# Altium PCB main.PcbDoc
Units mil, origin at the board's own origin, x right, y up, seen from the top; angles counter-clockwise.
Board outline 5193.03 x 2556.03 mil, 2 copper layers (Top Layer, Bottom Layer); 53 components, 131 nets, 440 pads, 127 vias.
Unrouted connection lines stored in the file: 3.
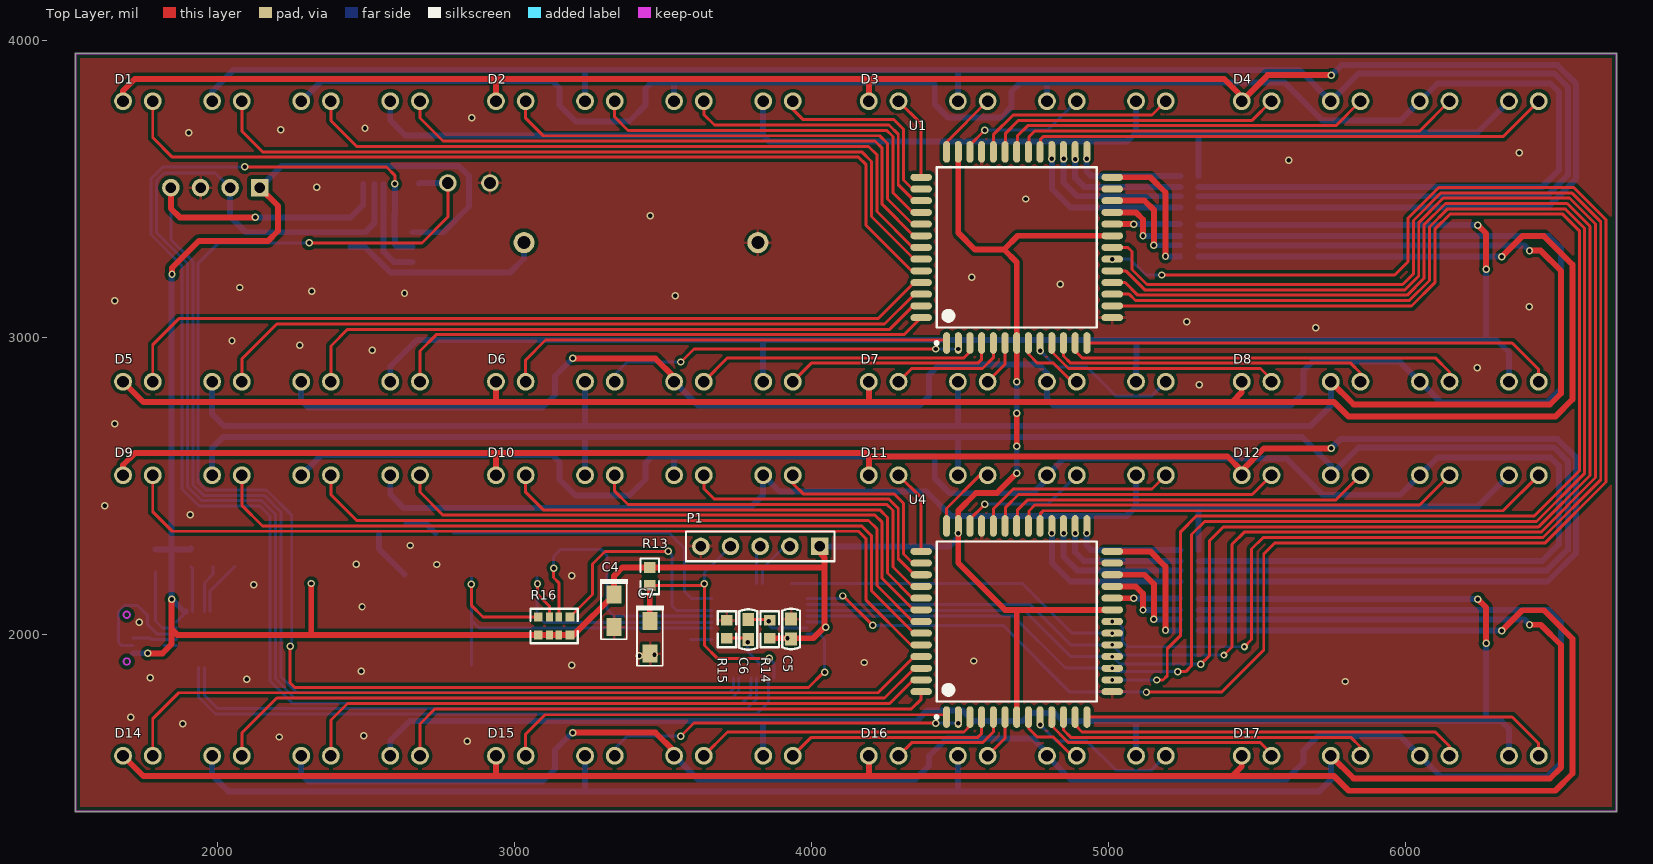
[diagram p0: Top Layer view]
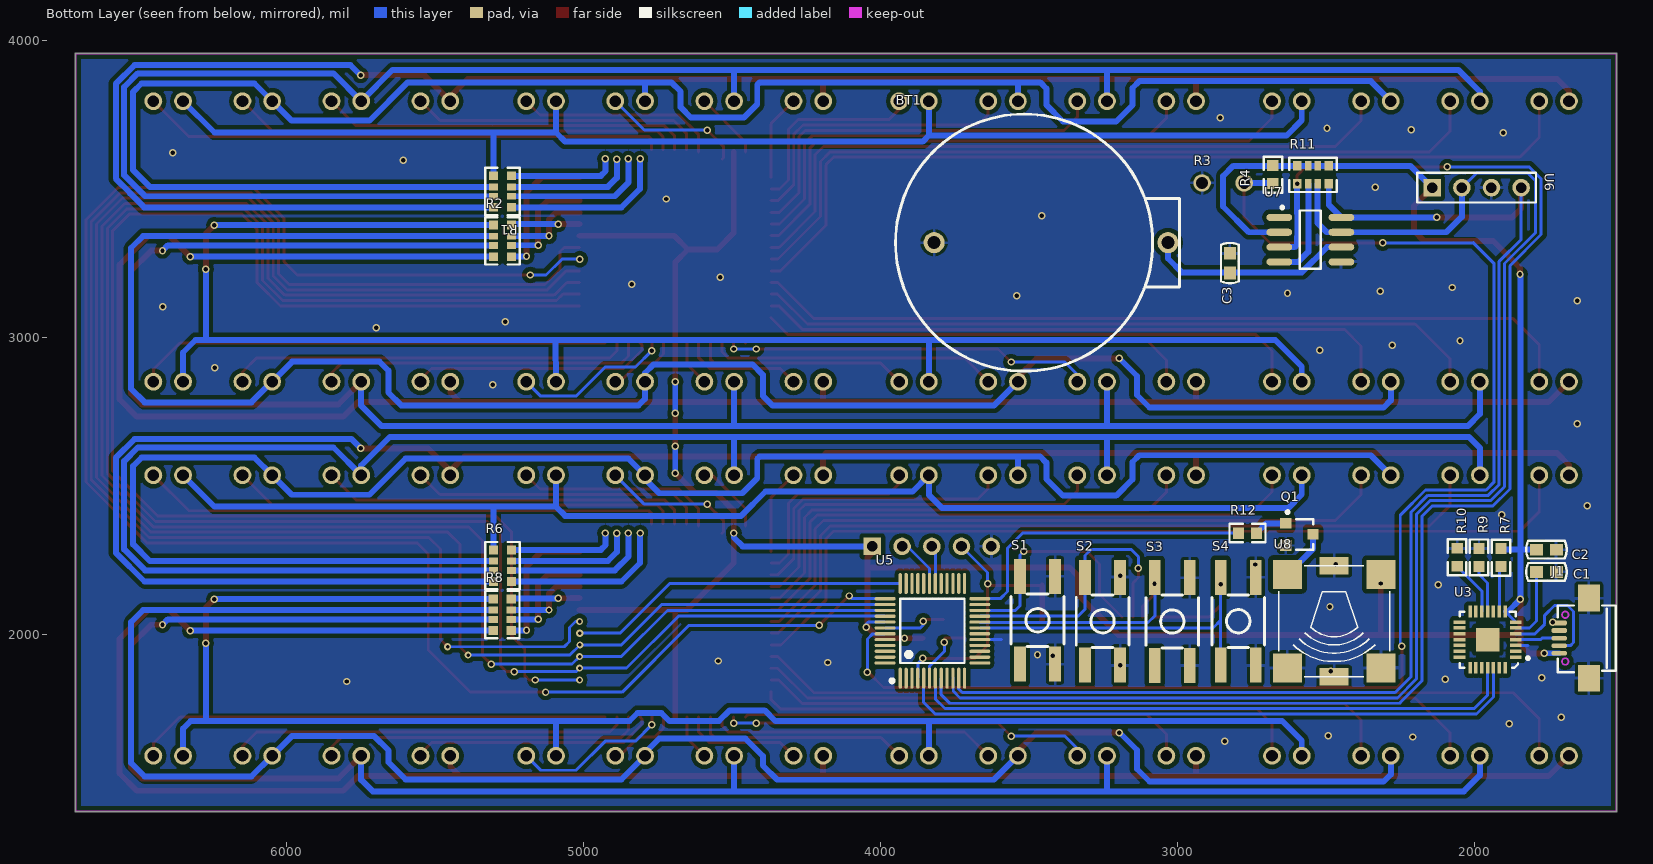
[diagram p1: Bottom Layer view, seen from below]

## Layer stack, top to bottom
Top Solder: solder mask 0.4, Solder Resist, Dk 3.5
Top Layer: signal copper 1.4
Dielectric 1: dielectric 12.6, FR-4, Dk 4.8
Bottom Layer: signal copper 1.4
Bottom Solder: solder mask 0.4, Solder Resist, Dk 3.5

## Board outline
1519.48,1404 ccw(c1522,1404) 1522,1401.48 6710,1401.48 ccw(c6710,1404) 6712.52,1404 6712.52,3955 ccw(c6710,3955) 6710,3957.51 1522,3957.51 ccw(c1522,3955) 1519.48,3955

## Design rules (kind name [scope] priority, off if disabled: settings)
Clearance [All] p1: gap=7 ignorepadtopadclearanceinfootprint=FALSE
HoleSize [All] p1: absolutevalues=TRUE maxlimit=500 minlimit=1 maxpercent=80.000 minpercent=20.000
MinimumSolderMaskSliver [All] p1: minsoldermaskwidth=0
PolygonConnect [All] p1: connectstyle=Relief reliefconductorwidth=10 reliefentries=4 polygonreliefangle="90 Angle" airgapwidth=10
RoutingVias [All] p1: holewidth=15 width=25 viastyle="Through Hole" minholewidth=15 minwidth=25 maxholewidth=28 maxwidth=50
SilkToSilkClearance [All] p1: silktosilkclearance=0
SilkToSolderMaskClearance [IsPad] p1: minsilkscreentomaskgap=0 clearancetoexposedcopper=TRUE
SolderMaskExpansion [All] p1: expansion=4
UnRoutedNet [All] p1: checkbadconnections=TRUE
Width [All] p1: maxlimit=50 minlimit=10 preferedwidth=10
25 further rules are at their usual default settings.

## Components (designator, comment, footprint, x,y, rotation, side; value= is the part's Value field where it differs from the comment)
BT1 "Battery" CR2032-2-1 3516,3319 r180 bottom
C1 "Cap" C-RAD-0603 1757,2210 r0 bottom value=100nF
C2 "Cap" C-RAD-0603 1757,2285 r0 bottom value=100nF
C3 "Cap" C-RAD-0603 2823,3250 r270 bottom value=100nF
C4 "Cap Pol" CAP-3216 3335,2079 r270 top value=100uF
C5 "Cap" C-RAD-0603 3931,2018 r270 top value=100nF
C6 "Cap" C-RAD-0603 3787,2016 r90 top value=100nF
C7 "Cap Pol" CAP-3216 3456,1990 r270 top value=10uF
D1 "LED8*8-TOP" LED8*8-half 2181.1,3795.51 r0 top
D2 "LED8*8-TOP" LED8*8-half 3437.01,3795.51 r0 top
D3 "LED8*8-TOP" LED8*8-half 4692.91,3795.51 r0 top
D4 "LED8*8-TOP" LED8*8-half 5948.82,3795.51 r0 top
D5 "LED8*8-BOTTOM" LED8*8-half 2181.1,2850.63 r0 top
D6 "LED8*8-BOTTOM" LED8*8-half 3437.01,2850.63 r0 top
D7 "LED8*8-BOTTOM" LED8*8-half 4692.91,2850.63 r0 top
D8 "LED8*8-BOTTOM" LED8*8-half 5948.82,2850.63 r0 top
D9 "LED8*8-TOP" LED8*8-half 2181.1,2535.67 r0 top
D10 "LED8*8-TOP" LED8*8-half 3437.01,2535.67 r0 top
D11 "LED8*8-TOP" LED8*8-half 4692.91,2535.67 r0 top
D12 "LED8*8-TOP" LED8*8-half 5948.82,2535.67 r0 top
D14 "LED8*8-BOTTOM" LED8*8-half 2181.1,1590.79 r0 top
D15 "LED8*8-BOTTOM" LED8*8-half 3437.01,1590.79 r0 top
D16 "LED8*8-BOTTOM" LED8*8-half 4692.91,1590.79 r0 top
D17 "LED8*8-BOTTOM" LED8*8-half 5948.82,1590.79 r0 top
J1 "USB_M" USB_MICRO 1614,1987 r90 bottom
P1 "Header5" HDR5X1_A 4027,2296 r180 top
Q1 "SS8050" SOT-23 2588.74,2336.4 r270 bottom
R1 "1K" RES0603ROW 5273,3491 r90 bottom
R2 "1K" RES0603ROW 5273,3325 r90 bottom
R3 "光敏电阻" RES3 2916.73,3520 r180 bottom
R4 "Res1" RES_0603 2678,3548 r90 bottom value=10K
R6 "1K" RES0603ROW 5273,2231 r90 bottom
R7 "Res1" RES_0603 1910,2258 r270 bottom value=10K
R8 "1K" RES0603ROW 5273.31,2065.85 r90 bottom
R9 "Res1" RES_0603 1984,2259 r270 bottom value=10K
R10 "Res1" RES_0603 2058,2259.32 r270 bottom value=10K
R11 "10K" RES0603ROW 2543.25,3547.31 r180 bottom
R12 "Res1" RES_0603 2763.68,2341 r0 bottom value=470
R13 "Res1" RES_0603 3455,2195 r90 top value=10K
R14 "Res1" RES_0603 3859,2017 r90 top value=0K
R15 "Res1" RES_0603 3715,2017 r270 top value=0K
R16 "10K" RES0603ROW 3133,2028 r180 top
S1 "SW-PB4" SW_PB4_A2_4.5*4.5 3471,2047 r90 bottom
S2 "SW-PB4" SW_PB4_A2_4.5*4.5 3252,2044 r90 bottom
S3 "SW-PB4" SW_PB4_A2_4.5*4.5 3017,2043 r90 bottom
S4 "SW-PB4" SW_PB4_A2_4.5*4.5 2795,2044 r90 bottom
U1 "HT1632C" QFP52-14mm-1.0mm 4691,3302.83 r90 top
U3 "CP2102" QFN-28 1860.51,1922.94 r0 bottom
U4 "HT1632C" QFP52-14mm-1.0mm 4691,2043 r90 top
U5 "nuvoton M0516" LQFP-48_7x7x05P 3829.9,2006.55 r90 bottom
U6 "AM2320" HDR4X1_A 2142,3504 r180 bottom
U7 "DS3231M" SOP-8 2552,3329 r180 bottom
U8 "MLT-8530" MLT-8530 2472,2044 r270 bottom

## Footprints (in the part's own frame and the unit in brackets; to place one, negate y for a bottom-side part, rotate by r counter-clockwise, add the part's x,y. Pads: shape width x height; smd on the part's side, far side on the other; paste and mask are expansions set on the pad)
C-RAD-0603 [mm] "贴片电容"
  rect 1.1x1 smd: 1(-0.85,0) 2(0.85,0)
  silkscreen extent -1.73,-0.76 1.73,0.76, body extent -1.14,-0.38 1.14,0.38, height 1
CAP-3216 [mil] "钽电容"
  rect 60x50 smd: 1(-55,0) 2(55,0)
  silkscreen extent -106,-48 96,46
CR2032-2-1 [mm] "纽扣电池CR2032-2-1"
  round 1.8 hole 1.1: 1(12.3,0) 2(-7.7,0)
  silkscreen extent -11,-11 13.3,11
HDR4X1_A [mm] "Connector; Header; 4 Position"
  rect 1.5x1.5 hole 0.9: 1(0,0)
  round 1.5 hole 0.9: 2(2.54,0) 3(5.08,0) 4(7.62,0)
  silkscreen extent -1.27,-1.27 8.89,1.27
HDR5X1_A [mm] "Connector; Header; 5 Position"
  rect 1.5x1.5 hole 0.9: 1(0,0)
  round 1.5 hole 0.9: 2(2.54,0) 3(5.08,0) 4(7.62,0) 5(10.16,0)
  silkscreen extent -1.27,-1.27 11.43,1.27
LED8*8-half [mil]
  round 60 hole 39.37: 1(-400,0) 2(-100,0) 3(200,0) 4(500,0) 5(-500,0) 6(-200,0) 7(100,0) 8(400,0)
LQFP-48_7x7x05P [mm]
  oval 1.8x0.28 smd mask+0.051: 1(-3.923,2.623) 2(-3.923,2.123) 3(-3.923,1.623) 4(-3.923,1.123) 5(-3.923,0.623) 6(-3.923,0.123) 7(-3.923,-0.377) 8(-3.923,-0.877) 9(-3.923,-1.377) 10(-3.923,-1.877) 11(-3.923,-2.377) 12(-3.923,-2.877) 25(4.177,-2.877) 26(4.177,-2.377) 27(4.177,-1.877) 28(4.177,-1.377) 29(4.177,-0.877) 30(4.177,-0.377) 31(4.177,0.123) 32(4.177,0.623) 33(4.177,1.123) 34(4.177,1.623) 35(4.177,2.123) 36(4.177,2.623)
  oval 0.28x1.8 smd mask+0.051: 13(-2.623,-4.177) 14(-2.123,-4.177) 15(-1.623,-4.177) 16(-1.123,-4.177) 17(-0.623,-4.177) 18(-0.123,-4.177) 19(0.377,-4.177) 20(0.877,-4.177) 21(1.377,-4.177) 22(1.877,-4.177) 23(2.377,-4.177) 24(2.877,-4.177) 37(2.877,3.923) 38(2.377,3.923) 39(1.877,3.923) 40(1.377,3.923) 41(0.877,3.923) 42(0.377,3.923) 43(-0.123,3.923) 44(-0.623,3.923) 45(-1.123,3.923) 46(-1.623,3.923) 47(-2.123,3.923) 48(-2.623,3.923)
  silkscreen extent -4.3,-2.88 2.88,3.47
MLT-8530 [mm] "蜂鸣器/MLT-8530"
  rect 2.5x2.5 smd mask+0.051: 1(-4,4) 2(-4,-4) 3(4,-4) 3(4,4)
  rect 1.5x2.5 smd mask+0.051: 3(-4.75,0) 3(4.75,0)
  silkscreen extent -4.75,-4.75 4.75,4.75
QFN-28 [mm]
  rect 1x0.3 smd: 1(0,0) 2(0,-0.5) 3(0,-1) 4(0,-1.5) 5(0,-2) 6(0,-2.5) 7(0,-3) 15(4.8,-3) 16(4.8,-2.5) 17(4.8,-2) 18(4.8,-1.5) 19(4.8,-1) 20(4.8,-0.5) 21(4.8,0)
  rect 0.3x1 smd: 8(0.9,-3.9) 9(1.4,-3.9) 10(1.9,-3.9) 11(2.4,-3.9) 12(2.9,-3.9) 13(3.4,-3.9) 14(3.9,-3.9) 22(3.9,0.9) 23(3.4,0.9) 24(2.9,0.9) 25(2.4,0.9) 26(1.9,0.9) 27(1.4,0.9) 28(0.9,0.9)
  rect 2x2 smd: 29(2.4,-1.5)
  silkscreen extent -1.17,-3.9 4.8,0.9
QFP52-14mm-1.0mm [mm] "QFP, 52-Leads, Body 14.00x14.00mm, Pitch 1.00mm, IPC Medium Density"
  oval 1.85x0.6 smd: 1(-8.175,6) 2(-8.175,5) 3(-8.175,4) 4(-8.175,3) 5(-8.175,2) 6(-8.175,1) 7(-8.175,0) 8(-8.175,-1) 9(-8.175,-2) 10(-8.175,-3) 11(-8.175,-4) 12(-8.175,-5) 13(-8.175,-6) 27(8.175,-6) 28(8.175,-5) 29(8.175,-4) 30(8.175,-3) 31(8.175,-2) 32(8.175,-1) 33(8.175,0) 34(8.175,1) 35(8.175,2) 36(8.175,3) 37(8.175,4) 38(8.175,5) 39(8.175,6)
  oval 0.6x1.85 smd: 14(-6,-8.175) 15(-5,-8.175) 16(-4,-8.175) 17(-3,-8.175) 18(-2,-8.175) 19(-1,-8.175) 20(0,-8.175) 21(1,-8.175) 22(2,-8.175) 23(3,-8.175) 24(4,-8.175) 25(5,-8.175) 26(6,-8.175) 40(6,8.175) 41(5,8.175) 42(4,8.175) 43(3,8.175) 44(2,8.175) 45(1,8.175) 46(0,8.175) 47(-1,8.175) 48(-2,8.175) 49(-3,8.175) 50(-4,8.175) 51(-5,8.175) 52(-6,8.175)
  silkscreen extent -8.3,-6.85 6.85,6.97, body extent -7,-7 7,7, height 3.4
RES3 [mm] "光敏电阻"
  round 1.5 hole 1: 1(0,0) 2(3.6,0)
RES0603ROW [mm]
  rect 0.75x0.8 smd mask+0.051: 1(-1.35,-0.77) 4(1.35,-0.77) 5(1.35,0.77) 8(-1.35,0.77)
  rect 0.58x0.8 smd mask+0.051: 2(-0.4,-0.77) 3(0.4,-0.77) 6(0.4,0.77) 7(-0.4,0.77)
  silkscreen extent -2.03,-1.47 2.02,1.47, body extent -1.6,-0.8 1.6,0.8, height 0.55
RES_0603 [mm]
  rect 0.93x0.98 smd: 1(-0.77,0) 2(0.77,0)
  silkscreen extent -1.53,-0.79 1.54,0.79, body extent -0.85,-0.4 0.85,0.4, height 0.56
SOP-8 [mm] "SOIC-max660"
  oval 2.2x0.6 smd: 1(-2.654,1.905) 2(-2.654,0.635) 3(-2.654,-0.635) 4(-2.654,-1.905) 5(2.654,-1.905) 6(2.654,-0.635) 7(2.654,0.635) 8(2.654,1.905)
  silkscreen extent -2.53,-2.5 0.9,2.88, body extent -1.95,-2.45 1.95,2.45, height 1.75
SOT-23 [mm]
  rect 0.9x0.95 smd: 1(-0.95,-1.175) 2(0.95,-1.175) 3(0,1.175)
  silkscreen extent -2.03,-1.14 1.3,1.18
SW_PB4_A2_4.5*4.5 [mm]
  rect 3x1 smd: 1(-3.75,1.5) 2(-3.75,-1.5) 3(3.75,-1.5) 4(3.75,1.5)
  silkscreen extent -2.25,-2.25 2.25,2.25
USB_MICRO [mm] "USB方孔"
  oct 0.4x1.35 smd: 1(-1.3,2.54) 2(-0.65,2.54) 3(0,2.54) 4(0.65,2.54) 5(1.3,2.54)
  rect 2.286x1.9 smd: 5(-3.429,0) 5(3.429,0)
  Keep-Out Layer circle w0.15: c2,2.023 r0.28
  Keep-Out Layer circle w0.15: c-2,2.023 r0.28
  silkscreen extent -2.92,-2.29 2.79,2.67

## Part data
BT1: "备份电池", LatestRevisionDate=17-Jul-2002, LatestRevisionNote="Re-released for DXP Platform.", PackageReference=BAT-2, Published=24-Mar-1999, Publisher="Altium Limited"
C1 C2 C3 C5 C6: "无极性电容", LatestRevisionDate=17-Jul-2002, LatestRevisionNote="Re-released for DXP Platform.", PackageReference=RAD-0.3, Published=8-Jun-2000, Publisher="Altium Limited"
C4 C7: "极性电解电容", LatestRevisionDate=17-Jul-2002, LatestRevisionNote="Re-released for DXP Platform.", PackageReference=RB7.6-15, Published=8-Jun-2000, Publisher="Altium Limited", Vol=16V
D1 D2 D3 D4 D9 D10 D11 D12: "8*8LED点阵上半部分"
D5 D6 D7 D8 D14 D15 D16 D17: "8*8LED点阵下半部分"
J1: "MicroUSB接口"
P1: "接插件"
Q1: "NPN贴片三极管", PackageDocument=Sep-1998, Code_JEDEC=TO-92A, ComponentLink1Description="Manufacturer Link", ComponentLink1URL=http://www.fairchildsemi.com/, ComponentLink2Description=Datasheet, ComponentLink2URL=http://www.fairchildsemi.com/ds/2N%2F2N3904.pdf, DatasheetDocument=1997, LatestRevisionDate=15-Jan-2003, LatestRevisionNote="PCB Footprint 'BCY-W3/D4.7' replaced", PackageReference=TO-92A, Published=8-Jun-2000, Publisher="Altium Limited"
R1 R2 R6 R8 R11 R16: library part "Res Row", "排阻0603*4"
R3: library part res3
R4 R7 R9 R10 R12 R13 R14 R15: "贴片电阻", LatestRevisionDate=17-Jul-2002, LatestRevisionNote="Re-released for DXP Platform.", PackageReference=AXIAL-0.4, Published=8-Jun-2000, Publisher="Altium Limited"
S1 S2 S3 S4: "微动开关", LatestRevisionDate=17-Jul-2002, LatestRevisionNote="Re-released for DXP Platform.", PackageReference=SPST-2, Published=24-Mar-1999, Publisher="Altium Limited"
U1 U4: "32×8 & 24×16 LED 驱动芯片"
U3: "USBתTTLоƬ"
U5: "新唐M0516单片机"
U6: "温湿度传感器"
U7: "实时时钟"
U8: "贴片蜂鸣器"

## Via types
v1: diameter 25, hole 15, Top Layer to Bottom Layer, 119 vias
v2: diameter 24, hole 12, Top Layer to Bottom Layer, 8 vias

## Nets (pads, with @x,y where several pads share a name; then routed paths per layer and width w, separated by ;. In a path a pad name is that pad's centre, name@x,y a point inside that pad or via, vN(x,y) a via of type N, cw(c..) or ccw(c..) an arc to the next point about the centre after c; other vN are vias at no path point)
AGND: C6.1 R15.2 U5.6 | length 209.4
  Top Layer w10: R15.2 C6.1@3782.85,1986.68
  Bottom Layer w10: v1(3785,1973) 3785,1942 3834.74,1892.26 U5.6
AVCC: C6.2 R14.2 U5.42 | length 222.8
  Top Layer w10: C6.2 3856.85,2049.46 R14.2 v1(3856,2044.32)
  Bottom Layer w10: v1(3856,2044.32) 3856,2031 3865.61,2021.39 U5.42
GND: BT1.2 C1.1 C2.1 C3.1 C4.2 C5.1 C7.2 J1.5 P1.5 Q1.2 R3.1 R9.1 R10.1 R15.1 S1.2 S1.3 S2.2 S2.3 S3.2 S3.3 S4.2 S4.3 U1.14 U1.25 U1.36 U3.3 U4.14 U4.25 U4.36 U5.17 U6.3 U7.5 U8.3 | length 114.6
  Bottom Layer w10: 1819.32,1962.32 U3.3 ; 3592.02,1982.02 U5.17
  other v1: 2841,1640 2207,1654 2492,1658 1882,1699 1707,1721 5797,1841 2098,1849 1773,1853 2483,1876 3192.94,1896.36 4177,1905 4546,1910 3420,1927 3471,1931 1735,2041 2486,2092 2122,2167 3192.94,2196.64 2737,2235 2467,2236.01 2648,2299 1907,2403 1620,2433 1653,2709 5306,2840 6242,2898 2521,2956 2276,2973 2048,2988 5698,3033 5264,3052 6417,3103 1653,3124 3541,3140 2629,3149 2317,3155 2074,3168 4838,3179 4539,3202 3456,3410 4722,3466 2333,3505 5607,3597 6384,3622 1903,3689 2212,3699 2496,3704 2856,3739
ICE-CLK: P1.3 U5.30 | length 129.9
  Bottom Layer w10: U5.30 3815.06,2284.06 P1.3
ICE-DAT: P1.2 U5.31 | length 173.8
  Bottom Layer w10: U5.31 3834.74,2221.74 3909,2296 P1.2
ICE-RST: C7.1 P1.4 R13.1 U5.4 | length 986.5
  Top Layer w10: R13.1 3633.69,2164.69 v1(3639,2170) 3639,1962 3682,1919 v1(3857,1919)
  Top Layer w20: R13.1 3455,2046 C7.1
  Bottom Layer w10: v1(3639,2170) 3639,2208 P1.4 ; v1(3857,1919) 3874.11,1901.89 U5.4
NetBT1_1: BT1.1 C3.2 U7.6 | length 692.1
  Bottom Layer w20: U7.6 2496,3304 2581,3219 2985,3219 3031.75,3265.75 BT1.1
NetC1_2: C1.2 U3.6 | length 245.1
  Bottom Layer w10: C1.2 1790.46,2044.54 1813.63,2021.37 U3.6
NetD1_1: D1.1 U1.48 | length 3016.2
  Top Layer w10: D1.1@1781.1,3795.67 D1.1 1781.1,3672.9 1847,3607 4158,3607 4184,3581 4184,3377 4336.74,3224.26 U1.48@4369.15,3224.26
NetD1_2: D1.2 U1.47 | length 2675.8
  Top Layer w10: D1.2@2081.1,3795.67 D1.2 2081.1,3694.9 2151,3625 4169,3625 4202,3592 4202,3407 4345.37,3263.63 U1.47@4369.15,3263.63
NetD1_3: D1.3 U1.46 | length 2342.5
  Top Layer w10: D1.3@2381.1,3795.67 D1.3 2381.1,3729.9 2468,3643 4192,3643 4220,3615 4220,3424 4341,3303 U1.46@4369.15,3303
NetD1_4: D1.4 U1.45 | length 2019.8
  Top Layer w10: D1.4@2681.1,3795.67 D1.4 2681.1,3738.9 2759,3661 4214,3661 4238,3637 4238,3448 4343.63,3342.37 U1.45@4369.15,3342.37
NetD1_5: D1.5 D2.5 D3.5 D4.5 R1.8 | length 6842.6
  Top Layer w20: D1.5@1681.1,3795.67 1681.1,3830.1 1721,3870 2937.01,3870 ; D2.5@2937.01,3795.67 2937.01,3870 ; D3.5@4192.91,3795.67 4192.91,3857.91 4194,3859 4194,3870 ; v1(5751,3883) 5536.15,3883 5448.82,3795.67 5448.82,3811.18 5390,3870 4194,3870 ; 2937.01,3870 4194,3870
  Bottom Layer w20: R1.8 6479.85,3437.85 6527,3485 6527,3486.4 6575,3534.4 6575,3854.6 6512.6,3917 5785,3917 v1(5751,3883)
NetD1_6: D1.6 D2.6 D3.6 D4.6 R1.7 | length 6510.5
  Bottom Layer w20: D1.6@1981.1,3795.67 1981.1,3828.1 2054,3901 3237,3901 ; D2.6@3237.01,3795.67 3237.01,3858.99 3237,3901 ; D3.6@4492.91,3795.67 4492.91,3900.91 5643.57,3900.91 5748.82,3795.67 5842.15,3889 6501,3889 6547,3843 6547,3546 6476.25,3475.25 R1.7 ; 4493,3901 3237,3901
NetD1_7: D1.7 D2.7 D3.7 D4.7 R1.6 | length 6374
  Bottom Layer w20: D1.7@2281.1,3775.9 D1.7 2281.1,3795.67 2348.43,3863 3128,3863 3151,3840 3151,3782 3206,3727 3385,3727 3441,3783 3441,3838 3462,3859 3537,3859 ; D2.7@3537.01,3795.67 3537.01,3858.99 ; D3.7@4792.91,3795.67 4792.91,3857.91 4794,3859 ; R1.6 6460.75,3506.75 6517,3563 6517,3827 6489,3855 6108.15,3855 5983.15,3730 5721,3730 5592,3859 4794,3859 ; 3537,3859 4407,3859 4415,3851 4415,3785 4460,3740 4638,3740 4673,3775 4673,3828 4704,3859 4794,3859
NetD1_8: D1.8 D2.8 D3.8 D4.8 R1.5 | length 4284.9
  Bottom Layer w20: D1.8@2581.1,3795.67 D1.8 2581.1,3730.9 2631.99,3680.01 3837.01,3680.01 ; D2.8@3837.01,3795.67 D2.8 3837.01,3680.01 ; 5092.91,3691.09 D3.8 D3.8@5092.91,3795.67 ; R1.5 5303.32,3689.91 ; D4.8@6348.82,3795.67 6243.06,3689.91 5303.32,3689.91 ; 3837.01,3680.01 3858.02,3659 5062,3659 5092.91,3689.91 5303.32,3689.91
NetD2_1: D2.1 U1.44 | length 1646.9
  Top Layer w10: D2.1@3037.01,3795.67 D2.1 3037.01,3737.99 3096,3679 4230,3679 4256,3653 4256,3466 4340.26,3381.74 U1.44@4369.15,3381.74
NetD2_2: D2.2 U1.43 | length 1329.8
  Top Layer w10: D2.2@3337.01,3795.67 D2.2 3337.01,3741.99 3382,3697 4253.54,3697 4274,3676.54 4274,3487 4339.89,3421.11 U1.43@4369.15,3421.11
NetD2_3: D2.3 U1.42 | length 996.7
  Top Layer w10: D2.3@3637.01,3795.67 D2.3 3637.01,3750.99 3673,3715 4261,3715 4292,3684 4292,3514 4345.52,3460.48 U1.42@4369.15,3460.48
NetD2_4: D2.4 U1.41 | length 671.1
  Top Layer w10: D2.4@3937.01,3795.67 D2.4 3937.01,3767.99 3972,3733 4278,3733 4310,3701 4310,3530 4340.15,3499.85 U1.41@4369.15,3499.85
NetD3_1: D3.1 U1.40 | length 288
  Top Layer w10: D3.1 4369.15,3719.28 U1.40
NetD3_2: D3.2 U1.39 | length 228
  Top Layer w10: U1.39@4454.78,3624.85 4454.78,3657.54 D3.2@4592.91,3795.67
NetD3_3: D3.3 U1.37 | length 473.1
  Top Layer w10: U1.37@4534,3600 4528,3606 4528,3642 v1(4584,3698)
  Bottom Layer w10: v1(4584,3698) 4795.24,3698 D3.3@4892.91,3795.67
NetD3_4: D3.4 U1.35 | length 685
  Top Layer w10: U1.35@4612.26,3624.85 4612.26,3682.26 4679,3749 5146.24,3749 D3.4@5192.91,3795.67
NetD4_1: D4.1 U1.34 | length 995.7
  Top Layer w10: U1.34@4653.63,3631.85 4653.63,3687.63 4697,3731 5484.15,3731 D4.1@5548.82,3795.67
NetD4_2: D4.2 U1.33 | length 1250.7
  Top Layer w10: U1.33@4693,3631.85 4693,3678 4728,3713 5766.15,3713 D4.2@5848.82,3795.67
NetD4_3: D4.3 U1.32 | length 1509.8
  Top Layer w10: U1.32@4732.37,3631.85 4732.37,3675.37 4752,3695 6048.15,3695 D4.3@6148.82,3795.67
NetD4_4: D4.4 U1.31 | length 1766
  Top Layer w10: U1.31@4771.74,3631.85 4771.74,3667.74 4780,3676 6329.15,3676 D4.4@6448.82,3795.67
NetD5_1: D5.1 U1.49 | length 2799.3
  Top Layer w10: D5.1@1781.1,2850.79 1781.1,2975.1 1869,3063 4224,3063 4345.89,3184.89 U1.49@4369.15,3184.89
NetD5_2: D5.2 U1.50 | length 2454.8
  Top Layer w10: D5.2@2081.1,2850.79 2081.1,2927.1 2199,3045 4246,3045 4346.52,3145.52 U1.50@4369.15,3145.52
NetD5_3: D5.3 U1.51 | length 2164.3
  Top Layer w10: D5.3@2381.1,2850.79 2381.1,2971.1 2437,3027 4263,3027 4342.15,3106.15 U1.51@4369.15,3106.15
NetD5_4: D5.4 U1.52 | length 1838.1
  Top Layer w10: D5.4 2681.1,2954.1 2736,3009 4311.54,3009 U1.52
NetD5_5: D5.5 D6.5 D7.5 D8.5 R2.8 | length 6957.9
  Top Layer w20: D5.5@1681.1,2850.79 1749.89,2782 2936,2782 ; D6.5@2937.01,2850.79 D6.5 2937.01,2783.01 2936,2782 ; D7.5@4192.91,2850.79 D7.5 4192.91,2783.91 4191,2782 ; D8.5@5448.82,2850.79 D8.5 5448.82,2814.82 5416,2782 ; v1(6325,3272) 6394,3341 6467,3341 6563,3245 6563,2791 6505,2733 5809,2733 5760,2782 5416,2782 ; 2936,2782 4191,2782 ; 4191,2782 5416,2782
  Bottom Layer w20: R2.8@5303.63,3272.7 5304.33,3272 v1(6325,3272)
NetD5_6: D5.6 D6.6 D7.6 D8.6 R2.7 | length 6794.8
  Top Layer w20: D8.6@5748.82,2850.79 5825.61,2774 6487,2774 6524,2811 6524,3224 6456,3292 v1(6418,3292)
  Bottom Layer w20: D5.6@1981.1,2850.79 D5.6 1981.1,2741.9 2022,2701 3235,2701 ; D6.6@3237.01,2850.79 D6.6 3237.01,2703.01 3235,2701 ; D7.6@4492.91,2850.79 D7.6 4492.91,2701 ; R2.7@5303.63,3310.1 6399.9,3310.1 v1(6418,3292) ; D8.6@5748.82,2850.79 D8.6 5748.82,2769.82 5680,2701 4492.91,2701 ; 3235,2701 4492.91,2701
NetD5_7: D5.7 D6.7 D7.7 D8.7 R2.6 | length 6594.8
  Top Layer w20: v1(3195,2929) 3474,2929 3537.01,2865.99 D6.7@3537.01,2850.79
  Bottom Layer w20: D5.7@2281.1,2850.79 D5.7 2281.1,2787.9 2305,2764 3094,2764 3136,2806 3136,2870 v1(3195,2929) ; D6.7@3537.01,2850.79 3617.8,2770 4363,2770 4396,2803 4396,2874 4431,2909 4764,2909 4792.91,2880.09 D7.7 4792.91,2793.09 4815,2771 5614,2771 5657,2814 5657,2888 5687,2918 5981.61,2918 6118.61,2781 6478,2781 6524,2827 6524,3301 6483.4,3341.6 R2.6@5303.63,3341.6
NetD5_8: D5.8 D6.8 D7.8 D8.8 R2.5 | length 5586.7
  Top Layer w20: v1(6244,3378) 6272,3350 v1(6272,3230)
  Bottom Layer w20: D5.8@2581.1,2850.79 2581.1,2902.1 2670.35,2991.35 6273,2991.35 ; D6.8@3837.01,2850.79 3837.01,2989 ; D7.8@5092.91,2850.79 5093.98,2988.01 ; R2.5@5303.63,3379 6243,3379 v1(6244,3378) ; v1(6272,3230) 6272,2992.35 6273,2991.35 ; D8.8@6348.82,2850.79 6348.82,2949.18 6306.65,2991.35 6273,2991.35
NetD6_1: D6.1 U1.1 | length 1522.8
  Top Layer w10: D6.1@3037.01,2850.79 3037.01,2924.01 3104,2991 4444.93,2991 U1.1@4454.78,2981.15
NetD6_2: D6.2 U1.2 | length 1237.2
  Top Layer w10: v1(3560,2917) 3603.85,2960.85 v1(4418.85,2960.85) ; v1(4494.15,2960.85) U1.2 U1.2@4494.15,2981.15
  Bottom Layer w10: D6.2@3337.01,2850.79 3337.01,2875.01 3379,2917 v1(3560,2917) ; v1(4418.85,2960.85) v1(4494.15,2960.85)
NetD6_3: D6.3 U1.3 | length 967.9
  Top Layer w10: D6.3@3637.01,2850.79 3717.22,2931 4513,2931 4533.52,2951.52 U1.3 U1.3@4533.52,2981.15
NetD6_4: D6.4 U1.4 | length 722.3
  Top Layer w10: D6.4@3937.01,2850.79 3999.22,2913 4560,2913 4572.89,2925.89 U1.4 U1.4@4572.89,2981.15
NetD7_1: D7.1 U1.5 | length 402.6
  Top Layer w10: D7.1@4292.91,2850.79 4337.13,2895 4576,2895 4612.26,2931.26 U1.5 U1.5@4612.26,2981.15
NetD7_2: D7.2 U1.6 | length 154.7
  Top Layer w10: D7.2@4592.91,2850.79 4651.63,2909.5 U1.6 U1.6@4651.63,2981.15
NetD7_3: D7.3 U1.8 | length 238.5
  Top Layer w10: U1.8@4730.37,2981.15 U1.8 4730.37,2943.63 4760,2914 4814,2914 4877.21,2850.79 D7.3@4892.91,2850.79
NetD7_4: D7.4 U1.9 | length 548.5
  Top Layer w10: v1(4770,2955) U1.9@4770,2997
  Bottom Layer w10: v1(4770,2955) 4825,2900 4927,2900 5025,2802 5144.13,2802 D7.4@5192.91,2850.79
NetD8_1: D8.1 U1.10 | length 820.5
  Top Layer w10: U1.10@4809.11,2981.15 4803,2975.04 4803,2957.54 4865.54,2895 5512,2895 5548.82,2858.18 D8.1@5548.82,2850.79
NetD8_2: D8.2 U1.11 | length 1097.1
  Top Layer w10: U1.11@4848.48,2981.15 U1.11 4848.48,2937.52 4873,2913 5816,2913 5848.82,2880.18 D8.2@5848.82,2850.79
NetD8_3: D8.3 U1.12 | length 1349.8
  Top Layer w10: U1.12@4887.85,2981.15 U1.12 4887.85,2954.15 4911,2931 6101,2931 6148.82,2883.18 D8.3@6148.82,2850.79
NetD8_4: D8.4 U1.13 | length 1599.8
  Top Layer w10: U1.13@4927.22,2981.15 6359.85,2981.15 6448.82,2892.18 D8.4@6448.82,2850.79
NetD9_1: D9.1 U4.48 | length 3017.3
  Top Layer w10: D9.1 1781.1,2412.9 1847,2347 4158,2347 4184,2321 4184,2115 4334.74,1964.26 U4.48
NetD9_2: D9.2 U4.47 | length 2675.8
  Top Layer w10: D9.2 2081.1,2434.9 2151,2365 4169,2365 4202,2332 4202,2147 4345.37,2003.63 U4.47
NetD9_3: D9.3 U4.46 | length 2342.5
  Top Layer w10: D9.3 2381.1,2469.9 2468,2383 4192,2383 4220,2355 4220,2164 4341,2043 U4.46
NetD9_4: D9.4 U4.45 | length 2019.8
  Top Layer w10: D9.4 2681.1,2478.9 2759,2401 4214,2401 4238,2377 4238,2188 4343.63,2082.37 U4.45
NetD9_5: D9.5 D10.5 D11.5 D12.5 R6.8 | length 6814.2
  Top Layer w20: D9.5 1681.1,2570.1 1721,2610 4183,2610 4192.91,2600.09 4192.91,2597.91 ; D10.5 2937.01,2599 ; D11.5 4192.91,2597.91 ; D12.5 D12.5@5448.82,2550.82 ; v1(5750,2626) 5524,2626 D12.5@5448.82,2550.82 ; 4192.91,2597.91 4194,2599 5401,2599 5448.82,2551.18 D12.5@5448.82,2550.82
  Bottom Layer w20: R6.8 6478.45,2177.85 6575,2274.4 6575,2594.6 6512.6,2657 5781,2657 v1(5750,2626)
NetD9_6: D9.6 D10.6 D11.6 D12.6 R6.7 | length 6655.1
  Bottom Layer w20: D9.6 1981.1,2628.1 2018,2665 3236,2665 ; D10.6 3237.01,2598.99 3237,2664 3236,2665 ; D11.6 4492.91,2663 ; 4493,2641 4493,2663 4492.91,2663 ; R6.7 6476.25,2215.25 6547,2286 6547,2583 6501,2629 5842.15,2629 D12.6 5748.82,2568.18 5652,2665 4492.91,2665 ; 3236,2665 4492.91,2665 ; 4492.91,2663 4492.91,2665
NetD9_7: D9.7 D10.7 D11.7 D12.7 R6.6 | length 6285.4
  Bottom Layer w20: D9.7@2281.1,2515.9 D9.7 2348.43,2603 3128,2603 3151,2580 3151,2522 3206,2467 3385,2467 3441,2523 3441,2578 3462,2599 3537,2599 ; D10.7 3537.01,2598.99 ; D11.7 4849.24,2592 5599,2592 5721,2470 5983.15,2470 D12.7 6108.15,2595 6489,2595 6517,2567 6517,2303 6460.75,2246.75 R6.6 ; D11.7@4794,2535.67 4794,2524 4745,2475 4465,2475 4415,2525 4415,2591 4407,2599 3537,2599
NetD9_8: D9.8 D10.8 D11.8 D12.8 R6.5 | length 4300.8
  Bottom Layer w20: D9.8 2581.1,2470.9 2627,2425 3792,2425 3837.01,2470.01 D10.8 3891.68,2481 4387,2481 4469,2399 5062,2399 5092.91,2429.91 ; D11.8 5092.91,2429.91 ; R6.5 5303.32,2429.23 5304,2429.91 ; D12.8 6243.06,2429.91 5304,2429.91 ; 5092.91,2429.91 5304,2429.91
NetD10_1: D10.1 U4.44 | length 1646.9
  Top Layer w10: D10.1 3037.01,2477.99 3096,2419 4230,2419 4256,2393 4256,2206 4340.26,2121.74 U4.44
NetD10_2: D10.2 U4.43 | length 1329.8
  Top Layer w10: D10.2 3337.01,2481.99 3382,2437 4253.54,2437 4274,2416.54 4274,2227 4339.89,2161.11 U4.43
NetD10_3: D10.3 U4.42 | length 996.7
  Top Layer w10: D10.3 3637.01,2490.99 3673,2455 4261,2455 4292,2424 4292,2254 4345.52,2200.48 U4.42
NetD10_4: D10.4 U4.41 | length 671.1
  Top Layer w10: D10.4 3937.01,2507.99 3972,2473 4278,2473 4310,2441 4310,2270 4340.15,2239.85 U4.41
NetD11_1: D11.1 U4.40 | length 288
  Top Layer w10: D11.1 4369.15,2459.43 U4.40
NetD11_2: D11.2 U4.39 | length 243.4
  Top Layer w10: U4.39 4454.78,2423.78 4566.67,2535.67 D11.2
NetD11_3: D11.3 U4.37 | length 473.1
  Top Layer w10: U4.37@4534,2340 4528,2346 4528,2382 v1(4584,2438)
  Bottom Layer w10: v1(4584,2438) 4795.24,2438 D11.3
NetD11_4: D11.4 U4.35 | length 685
  Top Layer w10: U4.35 4612.26,2422.26 4679,2489 5146.24,2489 D11.4
NetD12_1: D12.1 U4.34 | length 995.7
  Top Layer w10: U4.34@4653.63,2371.85 4653.63,2427.63 4697,2471 5484.15,2471 D12.1
NetD12_2: D12.2 U4.33 | length 1250.7
  Top Layer w10: U4.33@4693,2371.85 4693,2418 4728,2453 5766.15,2453 D12.2
NetD12_3: D12.3 U4.32 | length 1509.8
  Top Layer w10: U4.32@4732.37,2371.85 4732.37,2415.37 4752,2435 6048.15,2435 D12.3
NetD12_4: D12.4 U4.31 | length 1766
  Top Layer w10: U4.31@4771.74,2371.85 4771.74,2407.74 4780,2416 6329.15,2416 D12.4
NetD14_1: D14.1 U4.49 | length 2799.3
  Top Layer w10: D14.1 1781.1,1715.1 1869,1803 4224,1803 4345.89,1924.89 U4.49
NetD14_2: D14.2 U4.50 | length 2454.8
  Top Layer w10: D14.2 2081.1,1667.1 2199,1785 4246,1785 4346.52,1885.52 U4.50
NetD14_3: D14.3 U4.51 | length 2164.3
  Top Layer w10: D14.3 2381.1,1711.1 2437,1767 4263,1767 4342.15,1846.15 U4.51
NetD14_4: D14.4 U4.52 | length 1855.4
  Top Layer w10: D14.4 2681.1,1698.1 2732,1749 4337,1749 4369.15,1781.15 U4.52
NetD14_5: D14.5 D15.5 D16.5 D17.5 R8.8 | length 6958.3
  Top Layer w20: D14.5 1749.89,1522 2935,1522 ; D15.5 2937.01,1524.01 2935,1522 ; D16.5 4192.91,1523.91 4191,1522 ; D17.5 5448.82,1554.82 5416,1522 ; v1(6325,2012) 6394,2081 6467,2081 6563,1985 6563,1531 6505,1473 5809,1473 5760,1522 5416,1522 ; 2935,1522 4191,1522 ; 4191,1522 5416,1522
  Bottom Layer w20: R8.8 5304.33,2012 v1(6325,2012)
NetD14_6: D14.6 D15.6 D16.6 D17.6 R8.7 | length 6684.8
  Top Layer w20: D17.6 5825.61,1514 6487,1514 6524,1551 6524,1964 6456,2032 v1(6418,2032)
  Bottom Layer w20: D14.6 1981.1,1524.9 2035,1471 3236,1471 ; D15.6 3237.01,1472.01 3236,1471 ; D16.6 4492.91,1472.09 4494,1471 ; R8.7 6399.9,2050.1 v1(6418,2032) ; D17.6 5748.82,1509.82 5710,1471 4494,1471 ; 3236,1471 4494,1471
NetD14_7: D14.7 D15.7 D16.7 D17.7 R8.6 | length 6507.1
  Top Layer w20: v1(3195,1669) 3474,1669 3537.01,1605.99 D15.7
  Bottom Layer w20: D14.7 2281.1,1527.9 2305,1504 3094,1504 3136,1546 3136,1610 v1(3195,1669) ; D15.7 3617.8,1510 4348,1510 4396,1558 4396,1590 4455,1649 4745,1649 4792.91,1601.09 D16.7 4872.7,1511 5599,1511 5657,1569 5657,1609 5706,1658 5981.61,1658 D17.7 6118.61,1521 6478,1521 6524,1567 6524,2041 6483.4,2081.6 R8.6
NetD14_8: D14.8 D15.8 D16.8 D17.8 R8.5 | length 5597.4
  Top Layer w20: v1(6244,2118) 6272,2090 v1(6272,1970)
  Bottom Layer w20: D14.8 2581.1,1642.1 2647,1708 3837.01,1708 ; D15.8 3837.01,1708 ; D16.8 5092.91,1708 ; R8.5 6243,2119 v1(6244,2118) ; v1(6272,1970) 6272,1708 ; D17.8 6348.82,1682.18 6323,1708 6272,1708 ; 3837.01,1708 4354,1708 4390,1744 4508,1744 4544,1708 4711,1708 4738,1735 4818,1735 4845,1708 5092.91,1708 ; 5092.91,1708 6272,1708
NetD15_1: D15.1 U4.1 | length 1521.2
  Top Layer w10: D15.1 3037.01,1664.01 3102,1729 4446.93,1729 U4.1
NetD15_2: D15.2 U4.2 | length 1237.2
  Top Layer w10: v1(3560,1657) 3603.85,1700.85 v1(4418.85,1700.85) ; v1(4494.15,1700.85) U4.2
  Bottom Layer w10: D15.2 3337.01,1615.01 3379,1657 v1(3560,1657) ; v1(4418.85,1700.85) v1(4494.15,1700.85)
NetD15_3: D15.3 U4.3 | length 967.9
  Top Layer w10: D15.3 3717.22,1671 4513,1671 4533.52,1691.52 U4.3
NetD15_4: D15.4 U4.4 | length 722.3
  Top Layer w10: D15.4 3999.22,1653 4560,1653 4572.89,1665.89 U4.4
NetD16_1: D16.1 U4.5 | length 402.6
  Top Layer w10: D16.1 4337.13,1635 4576,1635 4612.26,1671.26 U4.5
NetD16_2: D16.2 U4.6 | length 154.7
  Top Layer w10: D16.2 4651.63,1649.5 U4.6
NetD16_3: D16.3 U4.8 | length 238.5
  Top Layer w10: U4.8 4730.37,1683.63 4760,1654 4814,1654 4877.21,1590.79 D16.3
NetD16_4: D16.4 U4.9 | length 548.5
  Top Layer w10: v1(4770,1695) U4.9@4770,1737
  Bottom Layer w10: v1(4770,1695) 4825,1640 4927,1640 5025,1542 5144.13,1542 D16.4
NetD17_1: D17.1 U4.10 | length 820.5
  Top Layer w10: U4.10 4803,1715.04 4803,1697.54 4865.54,1635 5512,1635 5548.82,1598.18 D17.1
NetD17_2: D17.2 U4.11 | length 1097.1
  Top Layer w10: U4.11 4848.48,1677.52 4873,1653 5816,1653 5848.82,1620.18 D17.2
NetD17_3: D17.3 U4.12 | length 1349.8
  Top Layer w10: U4.12 4887.85,1694.15 4911,1671 6101,1671 6148.82,1623.18 D17.3
NetD17_4: D17.4 U4.13 | length 1599.8
  Top Layer w10: U4.13 6359.85,1721.15 6448.82,1632.18 D17.4
NetJ1_2: J1.2 U3.5 | length 417.2
  Bottom Layer w10: J1.2 1676.59,1961.41 1666,1972 1666,2076.99 1686.01,2097 1730,2097 1763,2064 1763,2034 1795.31,2001.69 U3.5
NetJ1_3: J1.3 U3.4 | length 148.6
  Bottom Layer w10: J1.3 1771,1987 1776,1982 U3.4
NetQ1_1: Q1.1 R12.1 | length 112
  Bottom Layer w20: Q1.1 2700.57,2373.8 R12.1
NetQ1_3: Q1.3 U8.2 | length 171
  Bottom Layer w20: Q1.3 2542.48,2288.48 U8.2
NetR1_1: R1.1 U1.30 | length 562.8
  Top Layer w20: U1.30@4809,3600 v1(4809,3601)
  Bottom Layer w20: v1(4809,3601) 4810,3602 4810,3500 4872.15,3437.85 R1.1
NetR1_2: R1.2 U1.29 | length 494
  Bottom Layer w20: v1(4849,3601) 4848,3601 4848,3522 4894.75,3475.25 R1.2
NetR1_3: R1.3 U1.28 | length 431.6
  Top Layer w20: U1.28@4887,3601 v1(4888,3600)
  Bottom Layer w20: v1(4888,3600) 4888,3537 4918.25,3506.75 R1.3
NetR1_4: R1.4 U1.27 | length 365.7
  Top Layer w20: v1(4927,3601) U1.27@4928,3601
  Bottom Layer w20: v1(4927,3601) 4926,3600 4926,3560 4941.85,3544.15 R1.4
NetR2_1: R2.1 U1.26 | length 465.1
  Top Layer w20: U1.26@5012.85,3539.22 5140.78,3539.22 5192.15,3487.85 v1(5192.15,3272.85)
  Bottom Layer w20: v1(5192.15,3272.85) R2.1@5241.69,3272.85
NetR2_2: R2.2 U1.24 | length 360.8
  Top Layer w20: U1.24@5012.85,3460.48 5121.52,3460.48 5152.75,3429.25 v1(5152.75,3310.25)
  Bottom Layer w20: v1(5152.75,3310.25) R2.2@5241.69,3310.25
NetR2_3: R2.3 U1.23 | length 293.9
  Top Layer w20: U1.23@5012.85,3421.11 5091.89,3421.11 5116.25,3396.75 v1(5116.25,3341.75)
  Bottom Layer w20: v1(5116.25,3341.75) R2.3@5241.69,3341.75
NetR2_4: R2.4 U1.22 | length 228.8
  Top Layer w20: U1.22@5012.85,3381.74 5044.26,3381.74 v1(5084.85,3381.15)
  Bottom Layer w20: v1(5084.85,3381.15) R2.4@5241.69,3381.15
NetR3_2: R3.2 R4.1 U5.43 | length 4791.6
  Top Layer w10: v1(2244,1960) 2244,1836 2259,1821 3990,1821 4041,1872 v1(4044,1872) ; v1(2308,3318) 2688,3318 2775,3405 R3.2
  Bottom Layer w10: v1(2244,1960) 2249.27,1965.27 2249.27,2400.73 2164,2486 1960,2486 1934,2512 1934,3250 2003,3319 2004,3318 v1(2308,3318) ; U5.43 4026.29,2001.71 4044,1984 v1(4044,1872)
  Bottom Layer w20: R4.1 2680.31,3520 R3.2
NetR6_1: R6.1 U4.30 | length 562.8
  Top Layer w20: U4.30@4809,2340 v1(4809,2341)
  Bottom Layer w20: v1(4809,2341) 4810,2342 4810,2240 4872.15,2177.85 R6.1
NetR6_2: R6.2 U4.29 | length 494
  Bottom Layer w20: v1(4849,2341) 4848,2341 4848,2262 4894.75,2215.25 R6.2
NetR6_3: R6.3 U4.28 | length 431.6
  Top Layer w20: U4.28@4887,2341 v1(4888,2340)
  Bottom Layer w20: v1(4888,2340) 4888,2277 4918.25,2246.75 R6.3
NetR6_4: R6.4 U4.27 | length 365.7
  Top Layer w20: v1(4927,2341) U4.27@4928,2341
  Bottom Layer w20: v1(4927,2341) 4926,2340 4926,2300 4941.85,2284.15 R6.4
NetR7_2: R7.2 U3.9 | length 153.5
  Bottom Layer w10: R7.2 1915.63,2222.05 U3.9
NetR8_1: R8.1 U4.26 | length 465.1
  Top Layer w20: U4.26 5140.78,2279.22 5192.15,2227.85 v1(5192.15,2012.85)
  Bottom Layer w20: v1(5192.15,2012.85) R8.1@5241.69,2012.85
NetR8_2: R8.2 U4.24 | length 360.8
  Top Layer w20: U4.24 5121.52,2200.48 5152.75,2169.25 v1(5152.75,2050.25)
  Bottom Layer w20: v1(5152.75,2050.25) R8.2@5241.69,2050.25
NetR8_3: R8.3 U4.23 | length 293.9
  Top Layer w20: U4.23 5091.89,2161.11 5116.25,2136.75 v1(5116.25,2081.75)
  Bottom Layer w20: v1(5116.25,2081.75) R8.3@5241.69,2081.75
NetR8_4: R8.4 U4.22 | length 228.8
  Top Layer w20: U4.22 5044.26,2121.74 v1(5084.85,2121.15)
  Bottom Layer w20: v1(5084.85,2121.15) R8.4@5241.69,2121.15
NetR9_2: R9.2 U3.11 | length 164.2
  Bottom Layer w10: U3.11 1955,2173 1984,2202 R9.2
NetR10_2: R10.2 U3.12 | length 187
  Bottom Layer w10: U3.12 1974.68,2145.68 R10.2
NetR11_1: R11.1 U5.8 U7.3 | length 4843.2
  Top Layer w10: v1(2091,3574) 2568,3574 2596.4,3545.6 v1(2596.4,3517)
  Bottom Layer w10: v1(2091,3574) 1814.54,3574 1775,3534.46 1775,3346.09 1880,3241.09 1880,2489.63 1937.63,2432 2141.54,2432 2176.54,2397 2176.54,1842.54 2250,1769.09 2250,1767.67 3766.67,1767.67 3795.37,1796.37 U5.8
  Bottom Layer w20: v1(2596.4,3517) 2596.4,3417.57 2595.18,3416.35 2595.18,3341.65 2596.4,3340.43 2596.4,3312.6 2605,3304 U7.3
NetR11_2: R11.2 U7.4 | length 340.6
  Bottom Layer w20: R11.2 2559,3288 2593,3254 U7.4
NetR11_3: R11.3 U5.10 U6.2 U7.7 | length 4634.9
  Bottom Layer w10: U6.2 1992,3554 1820,3554 1793,3527 1793,3353.54 1898,3248.54 1898,2497.09 1945.09,2450 2149,2450 2194.54,2404.46 2194.54,1850 2258.87,1785.67 3731.75,1785.67 3754.83,1808.74 3754.83,1852.1 U5.10
  Bottom Layer w20: U6.2 2042,3406 2094,3354 U7.7 2497,3354 2527.5,3384.5 R11.3
NetR11_4: R11.4 U5.11 U6.4 U7.8 | length 4325.6
  Top Layer w20: U6.4 1842,3434 1872,3404 v1(2126,3404)
  Bottom Layer w10: U6.4 1842,3330 1916,3256 1916,2504.54 1952.54,2468 2156.54,2468 2212.54,2412 2212.54,1857.46 2266.33,1803.67 3724.3,1803.67 3736.32,1815.69 U5.11
  Bottom Layer w20: v1(2126,3404) U7.8 2490.1,3446.59 R11.4
NetR12_2: R12.2 U5.24 | length 1048.6
  Bottom Layer w10: R12.2 3521,2341 3572,2290 3572,2144 3596.18,2119.82 U5.24
NetR16_1: R16.1 S1.1 S1.4 U5.22 | length 813.4
  Top Layer w10: R16.1 3262,2134.17 3262,2237 3304,2279 v1(3518,2279)
  Bottom Layer w10: v1(3518,2279) 3530.06,2266.94 S1.4 3530.06,2095.94 3545.55,2080.45 U5.22
NetR16_2: R16.2 S2.1 S2.4 U5.21 | length 954.2
  Top Layer w10: v1(3131,2223) 3131,2191 3148.75,2173.25 R16.2
  Bottom Layer w10: v1(3131,2223) 3131,2261 3156,2286 3290,2286 3311.06,2264.94 S2.4 3311.06,2083.94 3334.24,2060.76 U5.21
NetR16_3: R16.3 S3.1 S3.4 U5.20 | length 856.8
  Top Layer w10: v1(3077,2170) 3077,2135 3117.25,2094.75 R16.3
  Bottom Layer w10: S3.4 3076.06,2061.94 3098.61,2039.39 3627.35,2039.39 3627.35,2039.91 3664.28,2039.91 U5.20
NetR16_4: R16.4 S4.1 S4.4 U5.19 | length 1430.5
  Top Layer w10: v1(2854,2169) 2854,2098 2893.69,2058.31 R16.4
  Bottom Layer w10: S4.1 2854.06,2046.94 ; S4.4 2854.06,2046.94 ; U5.19 2879.61,2021.39 2854.06,2046.94
NetU1_16: U1.16 U4.16 U5.40 | length 5917.8
  Top Layer w10: U1.16 5069.63,3145.35 5091,3123.98 6013.35,3123.98 6081,3191.63 6081,3371.46 6142.54,3433 6537.63,3433 6604,3366.63 6604,2542.54 6441.46,2380 5324,2380 5280,2336 5280,1894 5260,1874 v1(5234,1874)
  Bottom Layer w10: U5.40 4680.24,2060.76 4855,1886 v2(5013,1886) 5025,1874 v1(5234,1874)
NetU1_17: U1.17 U4.17 U5.39 | length 5934
  Top Layer w10: U1.17 5056.24,3184.72 5098.98,3141.98 6005.9,3141.98 6063,3199.09 6063,3378.91 6135.09,3451 6545.09,3451 6622,3374.09 6622,2535.09 6448.91,2362 5387,2362 5340,2315 5340,1928 v1(5311,1899)
  Bottom Layer w10: U5.39 4717.55,2080.45 4873,1925 v2(5013,1925) 5038.5,1899.5 5310.5,1899.5 v1(5311,1899)
NetU1_18: U1.18 U4.18 U5.38 | length 5953.5
  Top Layer w10: U1.18 5057.89,3224.09 5122,3159.98 5998.44,3159.98 6045,3206.54 6045,3386.37 6127.63,3469 6552.54,3469 6640,3381.54 6640,2527.63 6456.37,2344 5457,2344 5416,2303 5416,1957 v2(5389,1930)
  Bottom Layer w10: U5.38 4736.87,2100.13 4873,1964 v2(5012,1964) 5046,1930 v2(5389,1930)
NetU1_19: U1.19 U5.37 | length 6133.9
  Top Layer w10: v1(4105,2129) 4107,2129 v1(4206,2030) ; v1(5128,1805) 5381,1805 5523,1947 5523,2270 5561,2308 6471.28,2308 6676,2512.72 6676,3396.46 6567.46,3505 6112.72,3505 6009,3401.28 6009,3255 5964,3210 v1(5179,3210)
  Bottom Layer w10: U5.37 4095.82,2119.82 v1(4105,2129) ; v1(4206,2030) 4645,2030 4870,1805 v1(5128,1805) ; v1(5012.85,3263.46) 5072.54,3263.46 5126,3210 v1(5179,3210)
NetU3_25: U3.25 U5.7 | length 2055
  Bottom Layer w10: U3.25 1955,1794.67 2000,1749.67 3782.67,1749.67 3815.06,1782.06 U5.7
NetU3_26: U3.26 U5.5 | length 2139.2
  Bottom Layer w10: U3.26 1935.32,1788.9 1992.54,1731.67 3815.67,1731.67 3854.43,1770.43 U5.5
NetU4_19: U4.19 U5.36 | length 1149
  Bottom Layer w10: U5.36 4710,2171 4877.37,2003.63 v2(5012.85,2003.63)
OSC: U1.15 U4.15 | length 4761.1
  Top Layer w10: U1.15 6020.81,3105.98 6099,3184.18 6099,3364 6150,3415 6530.18,3415 6586,3359.18 6586,2550 6434,2398 5296,2398 5242,2344 5242,1995 5198,1951 5198,1860 5184,1846 v1(5163,1846)
  Bottom Layer w10: v2(5013,1846) v1(5163,1846)
SYNC: U1.20 U4.20 | length 4994.4
  Top Layer w10: U1.20 5065.17,3302.83 5079,3289 5079,3228.44 5129.46,3177.98 5990.98,3177.98 6027,3214 6027,3393.82 6120.18,3487 6560,3487 6658,3389 6658,2520.18 6463.82,2326 5521,2326 5482,2287 5482,1982 v2(5458,1958)
  Bottom Layer w10: v2(5013,2043) 5027,2043 5047,2023 5047,1976 5065,1958 v2(5458,1958)
VCC: C2.2 C4.1 C5.2 J1.1 P1.1 R4.2 R7.1 R11.5 R11.6 R11.7 R11.8 R13.2 R14.1 R16.5 R16.6 R16.7 R16.8 U1.7 U1.21 U1.38 U3.7 U3.8 U4.7 U4.21 U4.38 U5.41 U6.1 U7.2 U8.1 | length 9850.9
  Top Layer w10: C5.2@3918,1986 3918.69,1986.69 v1(3919,1987) ; v1@4043,2024 v1(4048,2024)
  Top Layer w20: v1(1764.18,1935.82) 1813.82,1935.82 1845,1967 1845,2016.64 ; v1(1845,2118) 1845,2016.64 ; 1845.18,2016.82 1845,2016.64 ; v1(1846,3212) 1846,3234 1937,3325 2170,3325 2203,3358 2203,3443 U6.1 ; v1(2315,2171) 2315,1998 ; R14.1 C5.2@3918.69,1986.69 ; C5.2@3931,1986.69 4005.69,1986.69 4043,2024 4043,2225 ; P1.1 4016.5,2285.5 4043,2259 4043,2225 ; U1.38 4494.15,3351.85 4550,3296 4648,3296 ; U4.7 4691,2078.37 4687,2082.37 ; v1(4691,2543) 4624,2476 4554,2476 4494.15,2416.15 U4.38 4494.15,2239.85 4651.63,2082.37 4687,2082.37 ; v1(4691,2633) v1(4691,2744) ; v1(4691,2851) U1.7 4691,3253 4648,3296 ; U4.21 4687,2082.37 ; U1.21 4694.2,3342.2 4648,3296 ; 1845,2016.64 1863.64,1998 2315,1998 ; 2315,1998 3199,1998 C4.1 3335,2197 3363.32,2225.32 R13.2 4042.68,2225.32 4043,2225
  Bottom Layer w10: U3.7 U3.8 ; U5.41 4040.92,2041.08 4053,2029 v1(4048,2024)
  Bottom Layer w18: J1.1 v1(1764.18,1935.82)
  Bottom Layer w20: C2.2 1845,2285 ; v1(1846,3212) 1845,3211 1845,2285 ; U3.8@1892.72,2076.49 1886.51,2076.49 v1(1845,2118) 1845,2285 ; R7.1 1906.69,2285 1845,2285 ; U6.1 2215.63,3577.63 R11.5 R11.6 R11.7 R11.8 2811.37,3577.63 2846,3543 2846,3441 2759,3354 U7.2 ; U8.1@2312,2174 v1(2315,2171) ; P1.1 4464,2296 4494,2326 v1(4494,2341) ; v1(4691,2543) v1(4691,2633) ; v1(4691,2744) v1(4691,2851)
pads on no net: J1.4 U3.1 U3.2 U3.10 U3.13 U3.14 U3.15 U3.16 U3.17 U3.18 U3.19 U3.20 U3.21 U3.22 U3.23 U3.24 U3.27 U3.28 U3.29 U5.1 U5.2 U5.3 U5.9 U5.12 U5.13 U5.14 U5.15 U5.16 U5.18 U5.23 U5.25 U5.26 U5.27 U5.28 U5.29 U5.32 U5.33 U5.34 U5.35 U5.44 U5.45 U5.46 U5.47 U5.48 U7.1

## Polygon pours and split planes (outlines as drawn)
GND on Bottom Layer "Top Layer-No Net" (solid, pour order 2): 1522,3955 6710,3955 6710,1404 1522,1404
GND on Top Layer "Top Layer-No Net" (solid, pour order 4): 1522,3955 1522,1404 6710,1404 6710,3955

## Keep-outs
Keep-Out Layer:
  lines w5: 1522,1404 6710,1404 6710,3955 1522,3955 1522,1404